# Altium PCB DongHo.PcbDoc
Units mil, origin at the board's own origin, x right, y up, seen from the top; angles counter-clockwise.
Board outline 8725 x 4075 mil, 2 copper layers (Top Layer, Bottom Layer); 6 components, 17 nets, 73 pads, 13 vias.
Unrouted connection lines stored in the file: 47.
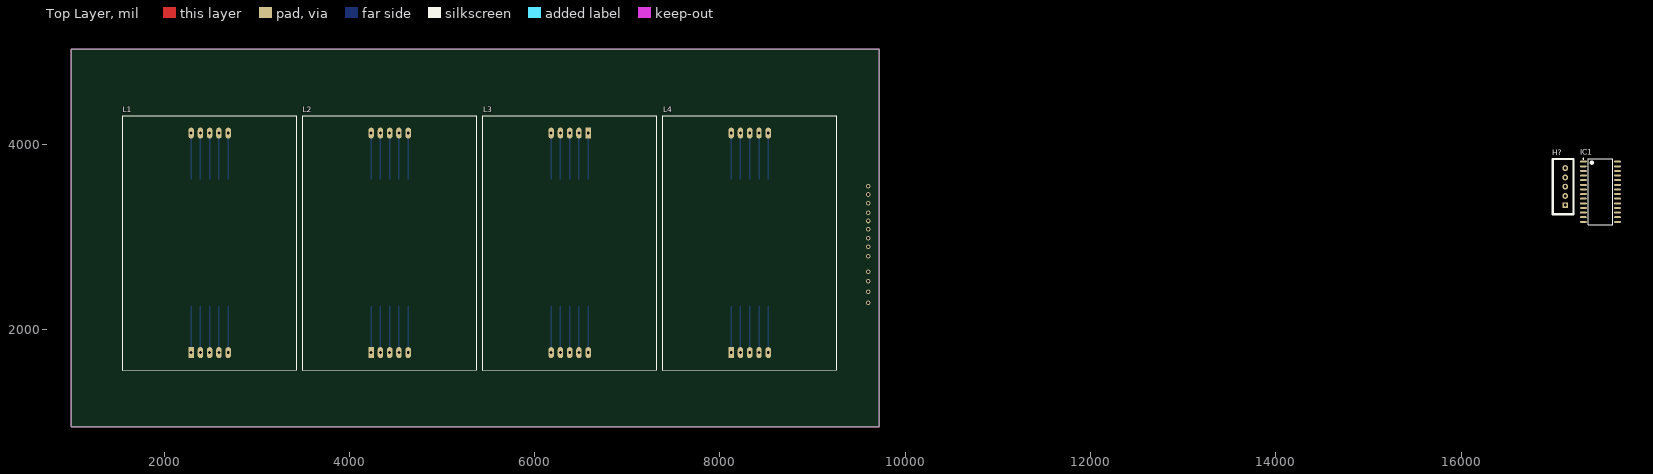
[diagram p0: Top Layer view]
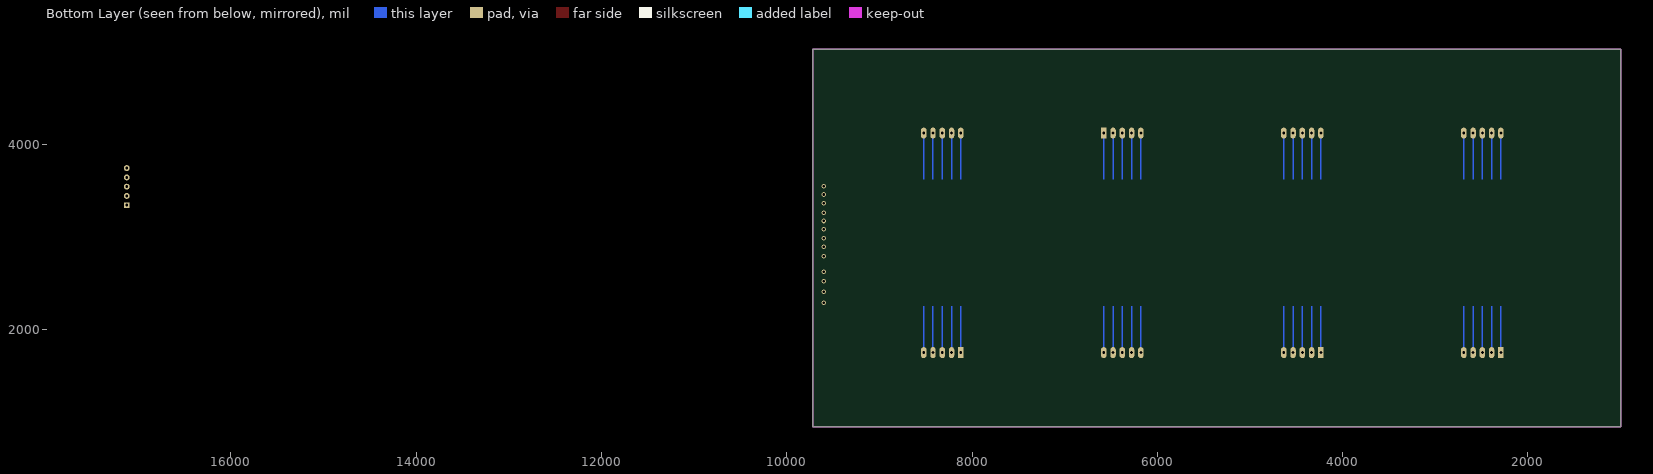
[diagram p1: Bottom Layer view, seen from below]

## Layer stack, top to bottom
Top Solder: solder mask 0.4, Solder Resist, Dk 3.5
Top Layer: signal copper 1.4
Dielectric 1: dielectric 12.6, FR-4, Dk 4.8
Bottom Layer: signal copper 1.4
Bottom Solder: solder mask 0.4, Solder Resist, Dk 3.5

## Board outline
995,950 9720,950 9720,5025 995,5025

## Design rules (kind name [scope] priority, off if disabled: settings)
Clearance [All] p1: gap=10 ignorepadtopadclearanceinfootprint=FALSE
PolygonConnect [All] p1: connectstyle=Relief reliefconductorwidth=10 reliefentries=4 polygonreliefangle="90 Angle" airgapwidth=10
RoutingVias [All] p1: holewidth=28 width=50 viastyle="Through Hole" minholewidth=28 minwidth=50 maxholewidth=28 maxwidth=50
SolderMaskExpansion [All] p1: expansion=4 istentingtop=FALSE
Width [All] p1: maxlimit=20 minlimit=10 preferedwidth=15
30 further rules are at their usual default settings.

## Components (designator, comment, footprint, x,y, rotation, side; value= is the part's Value field where it differs from the comment)
H? "Header 5P 2.54 DT" XH2.54M-5 17125,3340 r90 top
IC1 "AIP1628 SOP28" "SOP 28" 17505,3485 r0 top
L1 "LED 7 thanh 2.3 đỏ Anot 48x70mm, 23101BS" "LED 7 THANG 1" 2450,2781.85 r0 top
L2 "LED 7 thanh 2.3 đỏ Anot 48x70mm, 23101BS" "LED 7 THANG 1" 4393.33,2781.85 r0 top
L3 "LED 7 thanh 2.3 đỏ Anot 48x70mm, 23101BS" "LED 7 THANG 1" 6418.81,3085 r180 top
L4 "LED 7 thanh 2.3 đỏ Anot 48x70mm, 23101BS" "LED 7 THANG 1" 8280,2781.85 r0 top

## Footprints (in the part's own frame and the unit in brackets; to place one, negate y for a bottom-side part, rotate by r counter-clockwise, add the part's x,y. Pads: shape width x height; smd on the part's side, far side on the other; paste and mask are expansions set on the pad)
"LED 7 THANG 1" [mm] "C?m"
  rect 1.5x3 hole 0.8: 1(-4.037,-26.25)
  oval 1.5x3 hole 0.8: 2(-1.497,-26.25) 3(1.043,-26.25) 4(3.583,-26.25) 5(6.123,-26.25) 6(6.123,33.95) 7(3.583,33.95) 8(1.043,33.95) 9(-1.497,33.95) 10(-4.037,33.95)
  silkscreen extent -22.86,-31.06 24.94,38.76, body extent -22.98,-31.19 25.02,38.81, height 12.2
"SOP 28" [mm] "SOIC, 28-Leads, Body 18.00x7.50mm, Pitch 1.27mm, IPC Medium Density"
  oval 1.85x0.55 smd: 1(-4.675,8.255) 2(-4.675,6.985) 3(-4.675,5.715) 4(-4.675,4.445) 5(-4.675,3.175) 6(-4.675,1.905) 7(-4.675,0.635) 8(-4.675,-0.635) 9(-4.675,-1.905) 10(-4.675,-3.175) 11(-4.675,-4.445) 12(-4.675,-5.715) 13(-4.675,-6.985) 14(-4.675,-8.255) 15(4.675,-8.255) 16(4.675,-6.985) 17(4.675,-5.715) 18(4.675,-4.445) 19(4.675,-3.175) 20(4.675,-1.905) 21(4.675,-0.635) 22(4.675,0.635) 23(4.675,1.905) 24(4.675,3.175) 25(4.675,4.445) 26(4.675,5.715) 27(4.675,6.985) 28(4.675,8.255)
  silkscreen extent -4.8,-9 3.35,9.2, body extent -5.02,-9.01 5.28,8.89, height 2.73
XH2.54M-5 [mm]
  rect 1.6x1.6 hole 0.8: 1(0,0)
  round 1.6 hole 0.8: 2(2.54,0) 3(5.08,0) 4(7.62,0) 5(10.16,0)
  silkscreen extent -2.48,-2.26 12.64,3.46, body extent -2.48,-2.26 12.64,3.48, height 6.91

## Part data
H? L1 L2 L3 L4: "Cắm", Don_Vi=Con
  H?: Chung_Loai=Cắm, Ma_Hang=MH001298, Ten_Linh_Kien="Header 5P XH2.54-5P Đực Thẳng"
  L1 L2 L3 L4: Chung_Loai=Dán, Ma_Hang=MH009706, Ten_Linh_Kien="Led 7 0.28 1 Số Anot Sáng Đỏ"
IC1: library part AIP1628, "Dán", Chung_Loai=Dán, Don_Vi=Con, Kieu_Chan=SOP28, Ten_Linh_Kien=AIP1628

## Via types
v1: diameter 50, hole 28, Top Layer to Bottom Layer, 13 vias

## Nets (pads, with @x,y where several pads share a name; then routed paths per layer and width w, separated by ;. In a path a pad name is that pad's centre, name@x,y a point inside that pad or via, vN(x,y) a via of type N, cw(c..) or ccw(c..) an arc to the next point about the centre after c; other vN are vias at no path point)
+5: H?.5 IC1.7 IC1.21
A: IC1.8 L1.7 L2.7 L3.3 L4.7 | length 1993.9
  Bottom Layer w15: 2591.08,3620 L1.7 ; 4534.41,3620 L2.7 ; 6377.73,3620 L3.3 ; 8421.08,3620 L4.7
A1: IC1.27 L1.1 L1.5 | length 996.9
  Bottom Layer w15: L1.1 2291.08,2246.85 ; L1.5 2691.08,2246.85
A2: IC1.26 L2.1 L2.5 | length 996.9
  Bottom Layer w15: L2.1 4234.41,2246.85 ; L2.5 4634.41,2246.85
A3: IC1.24 L3.1 L3.5 | length 996.9
  Bottom Layer w15: 6177.73,3620 L3.5 ; 6577.73,3620 L3.1
A4: IC1.23 L4.1 L4.5 | length 996.9
  Bottom Layer w15: L4.1 8121.08,2246.85 ; L4.5 8521.08,2246.85
B: IC1.9 L1.6 L2.6 L3.2 L4.6 | length 1993.9
  Bottom Layer w15: 2691.08,3620 L1.6 ; 4634.41,3620 L2.6 ; 6477.73,3620 L3.2 ; 8521.08,3620 L4.6
C: IC1.10 L1.4 L2.4 L3.9 L4.4 | length 1993.9
  Bottom Layer w15: L1.4 2591.08,2246.85 ; L2.4 4534.41,2246.85 ; L3.9 6477.73,2246.85 ; L4.4 8421.08,2246.85
CLK: H?.2 IC1.3
D: IC1.11 L1.3 L2.3 L3.7 L4.3 | length 1993.9
  Bottom Layer w15: L1.3 2491.08,2246.85 ; L2.3 4434.41,2246.85 ; L3.7 6277.73,2246.85 ; L4.3 8321.08,2246.85
DIO: H?.3 IC1.2
DP: IC1.15 L1.8 L2.8 L3.8 L4.8 | length 1993.9
  Bottom Layer w15: 2491.08,3620 L1.8 ; 4434.41,3620 L2.8 ; L3.8 6377.73,2246.85 ; 8321.08,3620 L4.8
E: IC1.12 L1.2 L2.2 L3.6 L4.2 | length 1993.9
  Bottom Layer w15: L1.2 2391.08,2246.85 ; L2.2 4334.41,2246.85 ; L3.6 6177.73,2246.85 ; L4.2 8221.08,2246.85
F: IC1.13 L1.9 L2.9 L3.4 L4.9 | length 1993.9
  Bottom Layer w15: 2391.08,3620 L1.9 ; 4334.41,3620 L2.9 ; 6277.73,3620 L3.4 ; 8221.08,3620 L4.9
G: IC1.14 L1.10 L2.10 L3.10 L4.10 | length 1993.9
  Bottom Layer w15: 2291.08,3620 L1.10 ; 4234.41,3620 L2.10 ; L3.10 6577.73,2246.85 ; 8121.08,3620 L4.10
GND: H?.4 IC1.22 IC1.28
STB: H?.1 IC1.4
pads on no net: IC1.1 IC1.5 IC1.6 IC1.16 IC1.17 IC1.18 IC1.19 IC1.20 IC1.25
copper on no net:
  other v1: 9600,2285 9600,2405 9600,2520 9600,2620 9600,2790 9600,2890 9600,2985 9600,3080 9600,3170 9600,3260 9600,3360 9600,3455 9600,3545

## Keep-outs
Keep-Out Layer:
  the board outline again, w15.75